# Altium PCB V-by-One.pcbdoc (part 1 of 2)
Units mil, origin at the board's own origin, x right, y up, seen from the top; angles counter-clockwise.
Board outline 3962.76 x 3236.76 mil, 2 copper layers (Top Layer, Bottom Layer); 214 components, 135 nets, 733 pads, 287 vias.
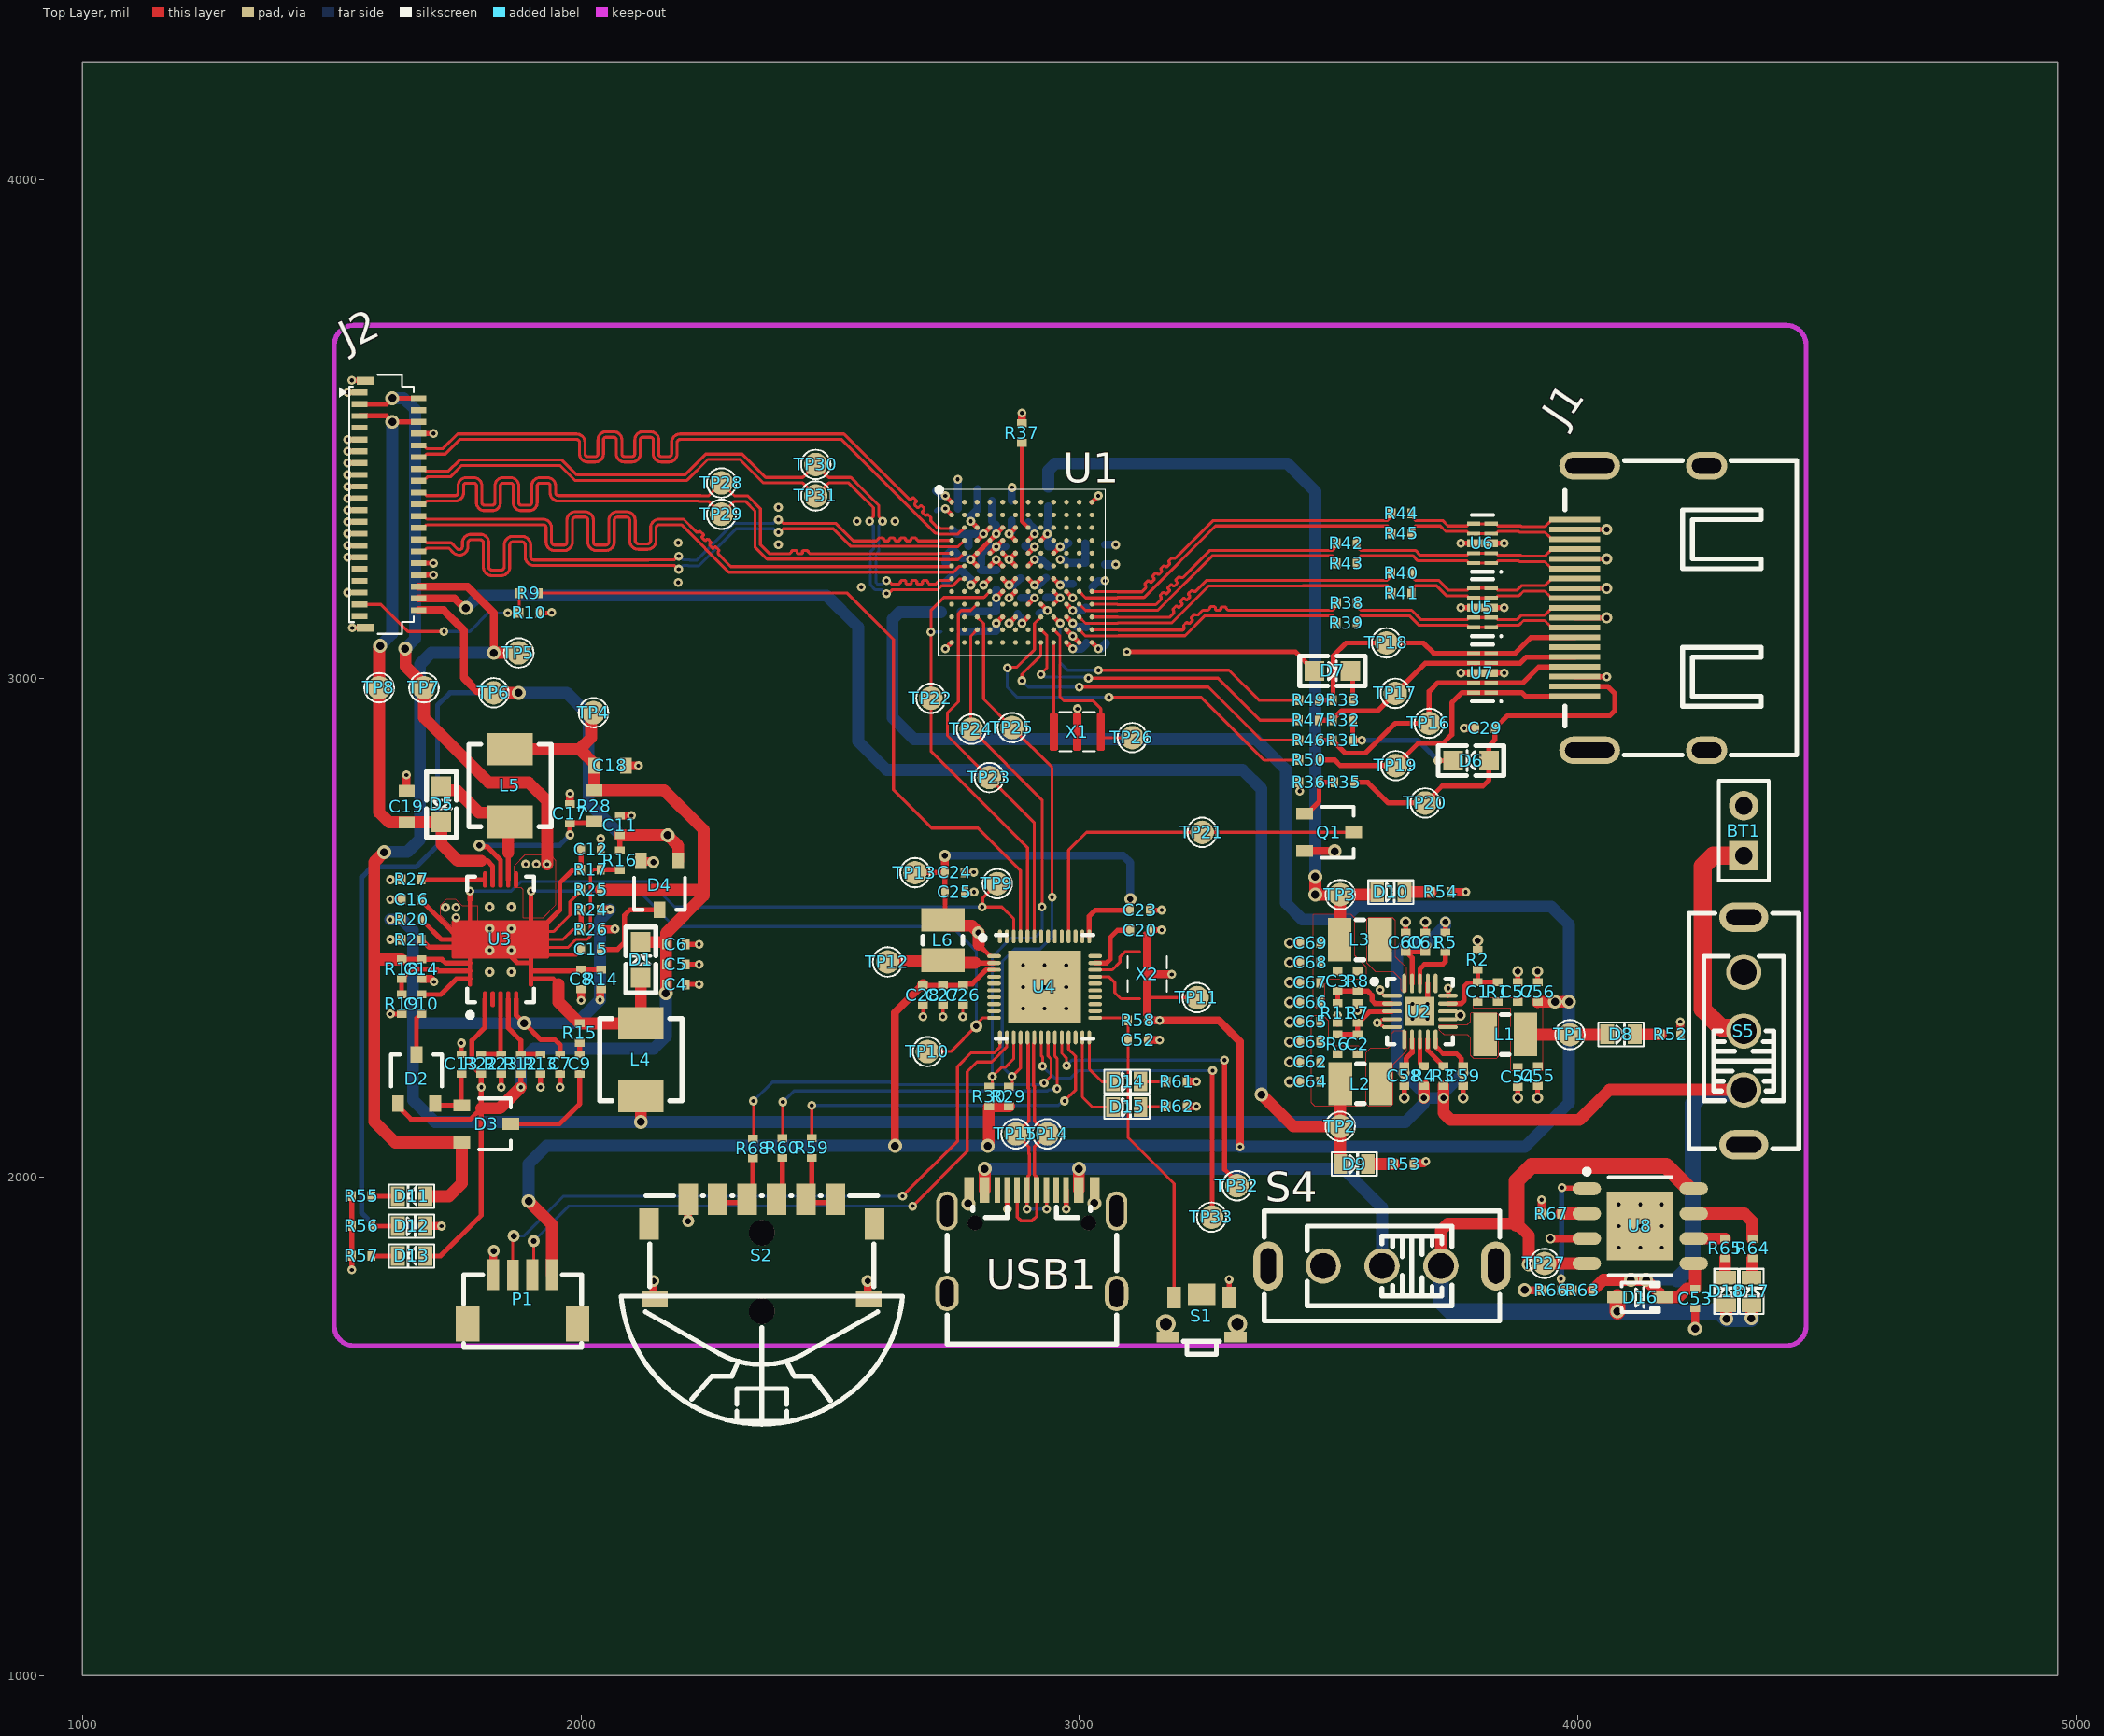
[diagram p0: Top Layer view]
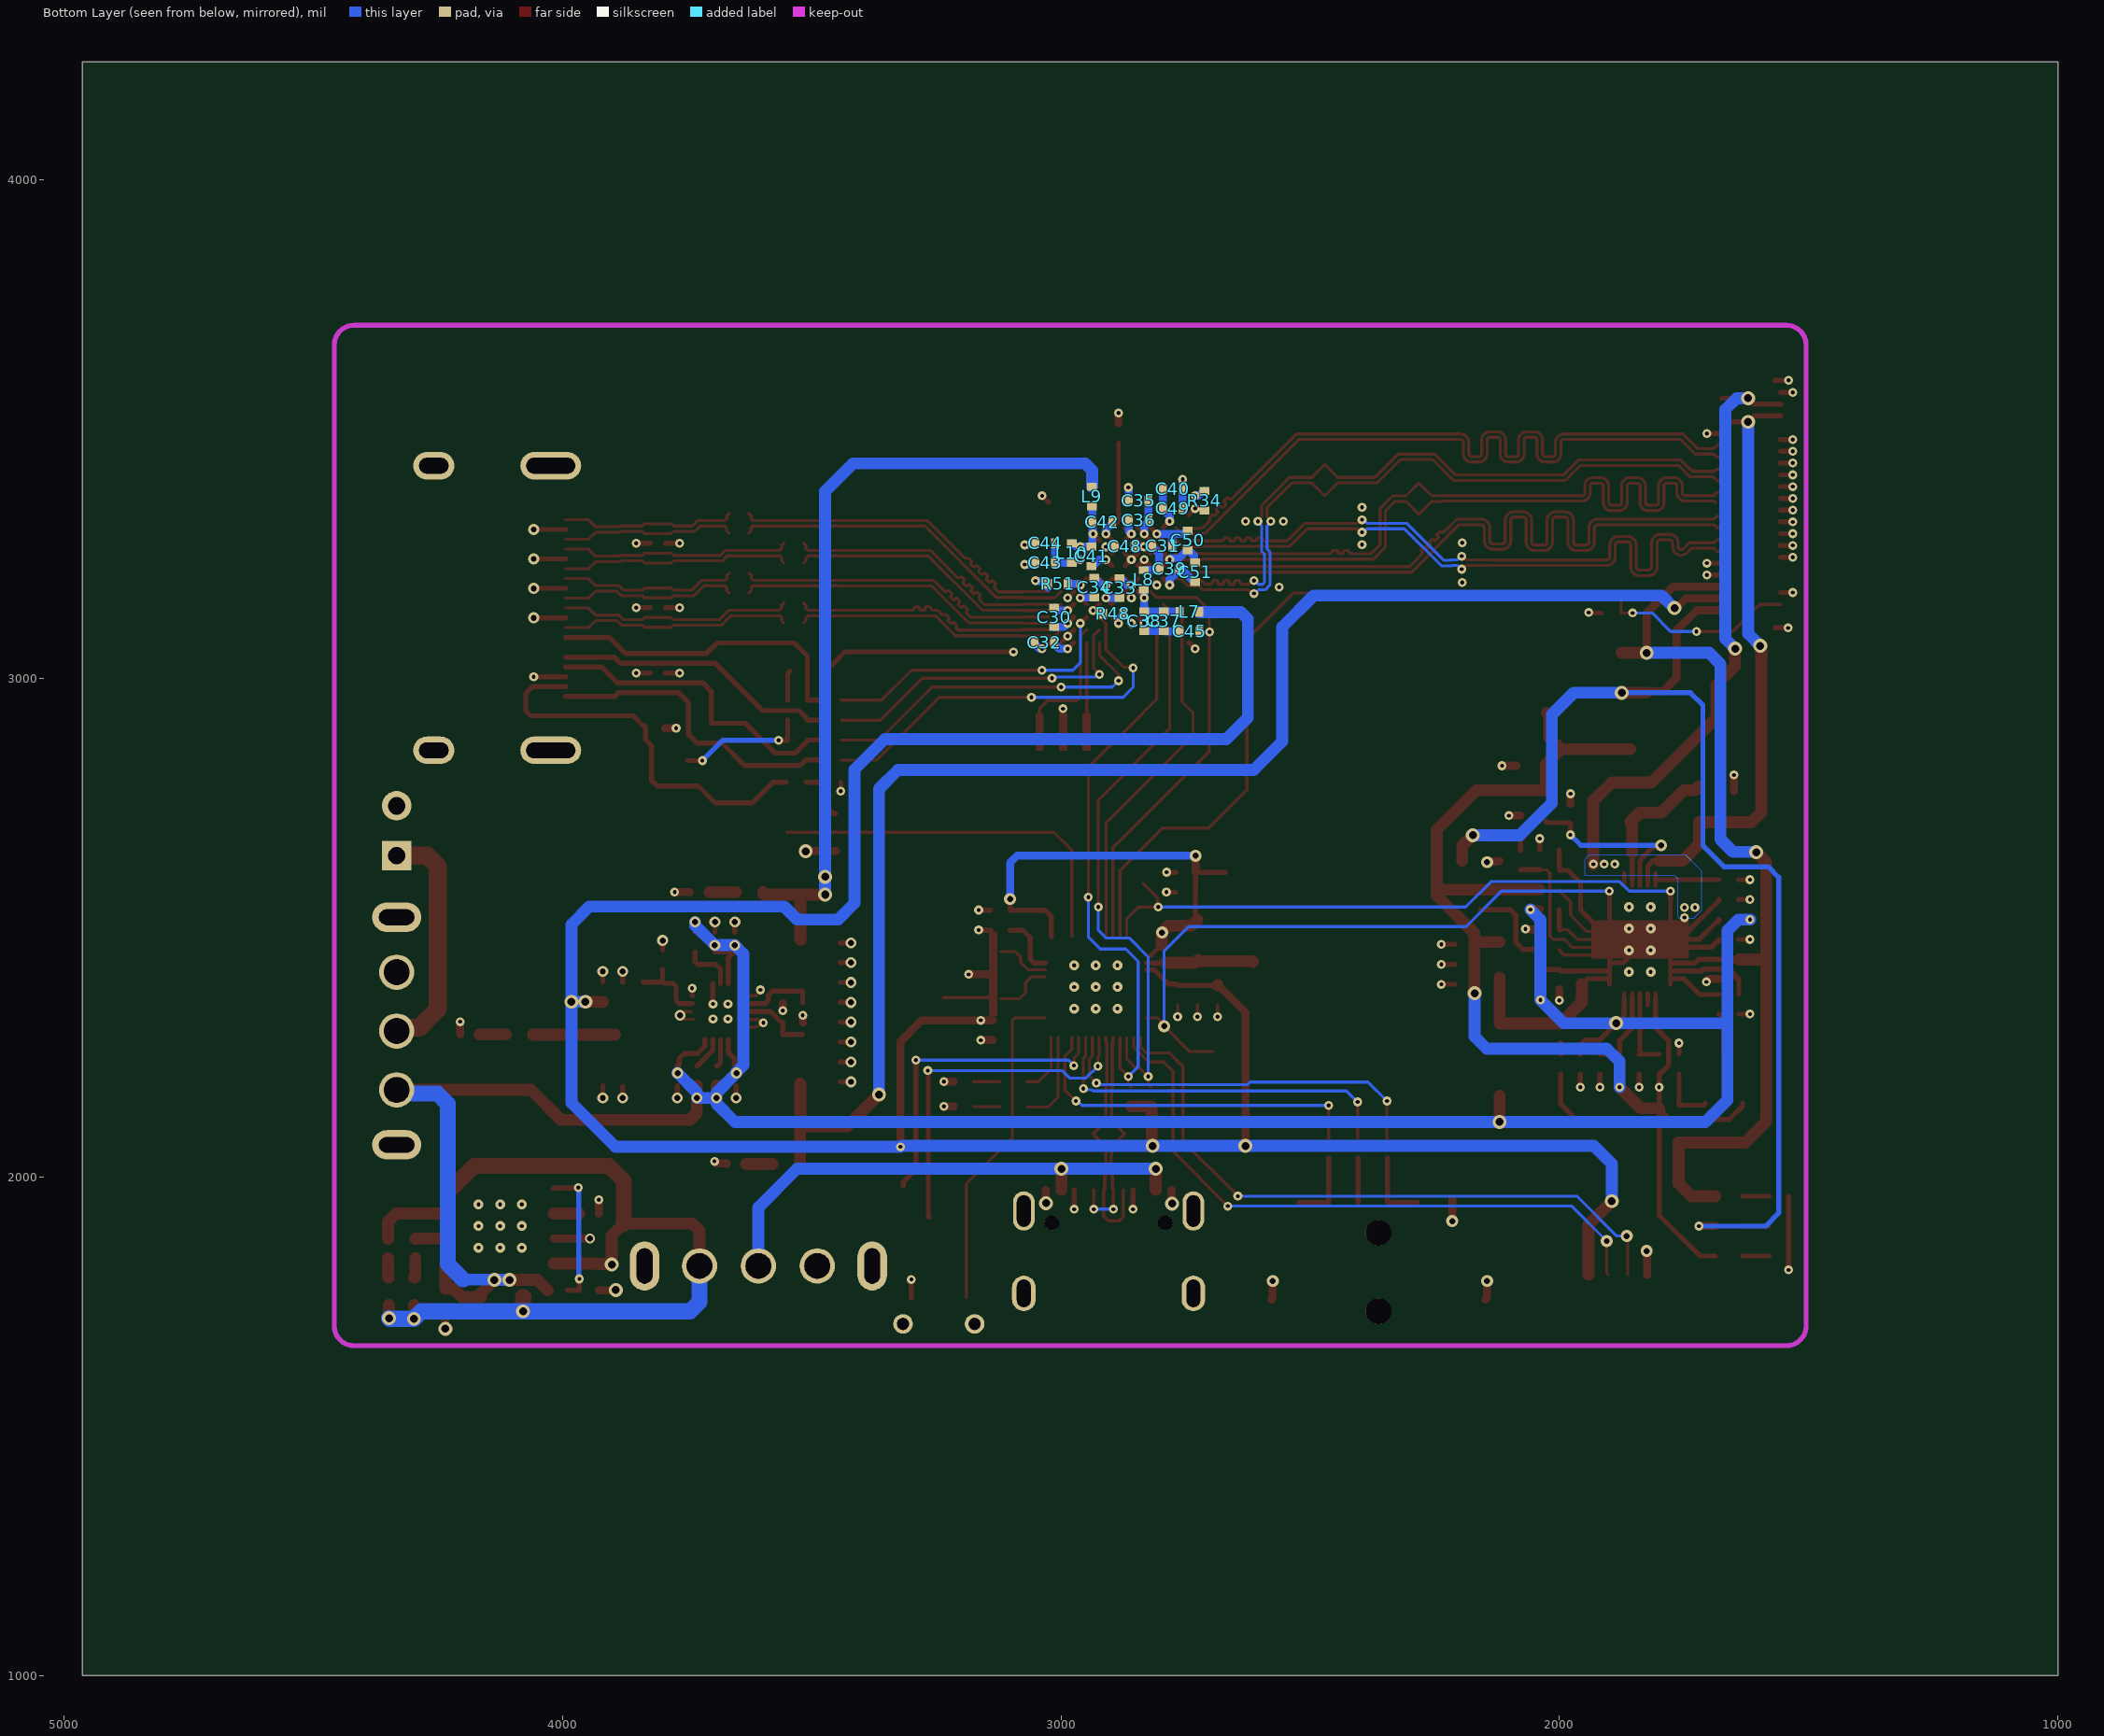
[diagram p1: Bottom Layer view, seen from below]

## Layer stack, top to bottom
Top Layer: signal copper (thickness not stored)
Dielectric: dielectric 12.6, FR-4, Dk 4.8
Bottom Layer: signal copper (thickness not stored)

## Board outline
4962.76,1000 1000,1000 1000,4236.76 4962.76,4236.76

## Components (designator, comment, footprint, x,y, rotation, side; value= is the part's Value field where it differs from the comment)
BT1 "8000mAH" HDR1X2 4332.64,2644.61 r90 top
C1 "Cap3" C0402#1 3799.13,2370.79 r270 top
C2 "Cap3" C0402#1 3558.06,2265.79 r270 top
C3 "Cap3" C0402#1 3518.06,2392.36 r90 top
C4 "Cap2" C0402#1 2190.32,2386.38 r180 top
C5 "Cap2" C0402#1 2190.32,2426.38 r180 top
C6 "Cap2" C0402#1 2190.32,2466.38 r180 top
C7 "Cap2" C0402#1 1958.14,2226.38 r90 top
C8 "Cap2" C0402#1 2000,2396.38 r270 top
C9 "Cap2" C0402#1 1997.52,2226.38 r90 top
C10 "Cap2" C0402#1 1680,2346.38 r270 top
C11 "Cap2" C0402#1 2077.64,2705.2 r270 top
C12 "Cap2" C0402#1 2020,2656.38 r180 top
C13 "Cap2" C0402#1 1760,2226.38 r270 top
C14 "Cap2" C0402#1 1680,2416.69 r90 top
C15 "Cap2" C0402#1 2020,2456.38 r180 top
C16 "Cap2" C0402#1 1660,2556.38 r0 top
C17 "Cap2" C0402#1 1977.64,2728.47 r270 top
C18 "Cap2" C0603 2058.23,2824.94 r180 top
C19 "Cap2" C0603 1650,2742.87 r270 top
C20 "Cap2" C0402#1 3121.3,2494.72 r0 top
C23 "Cap2" C0402#1 3120.98,2534.72 r180 top
C24 "Cap2" C0402#1 2749.68,2611.06 r180 top
C25 "Cap2" C0402#1 2750,2571.06 r180 top
C26 "Cap2" C0402#1 2765.98,2364.72 r90 top
C27 "Cap2" C0402#1 2725.98,2364.72 r90 top
C28 "Cap2" C0402#1 2685.98,2364.72 r90 top
C29 "Cap2" C0402#1 3813.5,2900.2 r180 top
C30 "Cap2" C0402#2 3013.5,3122.74 r270 bottom
C31 "Cap2" C0402#2 2796.76,3265.74 r180 bottom
C32 "Cap2" C0402#2 3033.5,3071.49 r0 bottom
C33 "Cap2" C0402#2 2882.5,3181.2 r90 bottom
C34 "Cap2" C0402#2 2933.5,3181.93 r90 bottom
C35 "Cap2" C0402#2 2844.19,3356.12 r0 bottom
C36 "Cap2" C0402#2 2844.5,3316.74 r0 bottom
C37 "Cap2" C0402#2 2793.12,3114.49 r270 bottom
C38 "Cap2" C0402#2 2833.12,3114.49 r270 bottom
C39 "Cap2" C0402#2 2782.25,3219.74 r180 bottom
C40 "Cap2" C0402#2 2775.5,3380.12 r180 bottom
C41 "Cap2" C0402#2 2938.5,3245.05 r270 bottom
C42 "Cap2" C0402#2 2916.82,3313.74 r180 bottom
C43 "Cap2" C0402#2 3031.19,3232.05 r0 bottom
C44 "Cap2" C0402#2 3031.5,3271.43 r0 bottom
C45 "Cap2" C0402#2 2741.87,3094 r180 bottom
C48 "Cap2" C0402#2 2872,3264.38 r0 bottom
C49 "Cap2" C0402#2 2775.5,3340.74 r180 bottom
C50 "Cap2" C0402#2 2745.5,3276.74 r90 bottom
C51 "Cap2" C0402#2 2731,3213.3 r270 bottom
C52 "Cap2" C0402#1 3117.2,2274.29 r180 top
C53 "Cap2" C0402#1 4235,1756.06 r90 top
C54 "Cap2" C0402#1 3879.13,2200.79 r90 top
C55 "Cap2" C0402#1 3919.13,2202.45 r90 top
C56 "Cap2" C0402#1 3919.13,2370.79 r270 top
C57 "Cap2" C0402#1 3879.13,2370.79 r270 top
C58 "Cap2" C0402#1 3651.45,2202.76 r90 top
C59 "Cap2" C0402#1 3769.59,2202.45 r90 top
C60 "Cap2" C0402#1 3654.13,2470.79 r270 top
C61 "Cap2" C0402#1 3694.13,2470.79 r270 top
C62 "Cap2" C0402#1 3462.88,2230.79 r0 top
C63 "Cap2" C0402#1 3462.88,2270.79 r0 top
C64 "Cap2" C0402#1 3462.88,2190.79 r0 top
C65 "Cap2" C0402#1 3462.88,2310.79 r0 top
C66 "Cap2" C0402#1 3462.88,2350.17 r0 top
C67 "Cap2" C0402#1 3462.88,2390.17 r0 top
C68 "Cap2" C0402#1 3462.88,2430.17 r0 top
C69 "Cap2" C0402#1 3462.88,2469.55 r0 top
D1 "B5819W" DO-SOD523 2120,2436.38 r90 top
D2 "BAT54S-KL4" SOT23-3 1670,2196.38 r0 top
D3 "BAT54S-KL4" SOT23-3 1810,2106.38 r270 top
D4 "BAT54S-KL4" SOT23-3 2157.64,2585.2 r180 top
D5 "B5819W" DO-SOD523 1720,2746.38 r270 top
D6 "B5819W" DO-SOD523 3784.38,2835.2 r180 top
D7 "B5819W" DO-SOD523 3508.5,3015.2 r0 top
D8 "红色0603" "LED0603 R" 4086.15,2285.88 r0 top
D9 "橙色0603" "LED0603 Y" 3551,2025.88 r0 top
D10 "橙色0603" "LED0603 Y" 3624.68,2571.38 r0 top
D11 "蓝色0603" "LED0603 B" 1660,1961.38 r180 top
D12 "蓝色0603" "LED0603 B" 1660,1901.38 r0 top
D13 "橙色0603" "LED0603 Y" 1660,1841.38 r180 top
D14 "绿色0603" "LED0603 G" 3095,2191.38 r0 top
D15 "绿色0603" "LED0603 G" 3095,2140.19 r0 top
D16 "B5819W" DO-SOD323 4125,1758.65 r0 top
D17 "蓝色0603" "LED0603 B" 4348.44,1770.29 r90 top
D18 "蓝色0603" "LED0603 B" 4297.25,1770.29 r90 top
J1 "HDMI_TYPE_A_0" HDMI-SMD_A71-05H9-111N1 4125.87,3141.38 r90 top
J2 "LCD_FPC_39P" FPC-SMD_FH26W-39S-0.3SHW-60 1615.03,3349.47 r270 top
L1 "252012CDMCDDS-2R2MC" IND-SMD_L2.5-W2.0 3854.13,2285.79 r180 top
L2 "252012CDMCDDS-2R2MC" IND-SMD_L2.5-W2.0 3563.66,2186.91 r0 top
L3 "252012CDMCDDS-2R2MC" IND-SMD_L2.5-W2.0 3562.54,2475.79 r0 top
L4 "SWPA4020S100MT" IND-SMD_L4.2-W4.4_MWSA0402S-XX 2120,2235.2 r90 top
L5 "SWPA4020S100MT" IND-SMD_L4.2-W4.4_MWSA0402S-XX 1857.64,2785.2 r270 top
L6 "UHP252010NF-100M" IND-SMD_L2.5-W2.0 2725.98,2475.2 r270 top
L7 "Ind1" L0402 2741.87,3133.38 r180 bottom
L8 "Ind1" L0402 2833.5,3197.74 r270 bottom
L9 "Ind1" L0402 2937.5,3364.99 r90 bottom
L10 "Ind1" L0402 2977.88,3251.74 r90 bottom
P1 "A1002WV-S-4P" CONN-SMD_A1002WV-S-4P 1882.64,1754.61 r0 top
Q1 "NPN1" SOT23-3 3500.87,2691.38 r270 top
R1 "Res2" R0402#1 3839.13,2370.79 r90 top
R2 "Res2" R0402#1 3799.13,2435.79 r90 top
R3 "Res1" R0402#1 3730.21,2202.76 r90 top
R4 "Res1" R0402#1 3690.83,2202.76 r90 top
R5 "Res1" R0402#1 3734.13,2470.79 r270 top
R6 "Res2" R0402#1 3518.06,2266.1 r90 top
R7 "Res2" R0402#1 3558.06,2328.91 r90 top
R8 "Res2" R0402#1 3558.06,2392.36 r270 top
R9 "1/32W" R0402#1 1895.55,3171.38 r0 top
R10 "1/32W" R0402#1 1895.87,3131.38 r180 top
R11 "Res2" R0402#1 3518.06,2329.23 r270 top
R12 "Res1" R0402#1 1879.38,2226.38 r90 top
R13 "Res1" R0402#1 1918.76,2226.38 r270 top
R14 "Res1" R0402#1 2040,2396.38 r90 top
R15 "Res1" R0402#1 1997.52,2288.34 r90 top
R16 "Res1" R0402#1 2077.64,2635.2 r270 top
R17 "Res1" R0402#1 2020,2616.38 r180 top
R18 "Res2" R0402#1 1640,2416.69 r270 top
R19 "Res2" R0402#1 1640,2346.38 r270 top
R20 "Res1" R0402#1 1660,2516.38 r0 top
R21 "Res1" R0402#1 1660,2476.38 r180 top
R22 "Res2" R0402#1 1800,2226.38 r90 top
R23 "Res2" R0402#1 1840,2226.38 r270 top
R24 "Res1" R0402#1 2020,2536.38 r180 top
R25 "Res1" R0402#1 2020,2576.38 r0 top
R26 "Res1" R0402#1 2020,2496.38 r0 top
R27 "Res1" R0402#1 1660.32,2596.38 r0 top
R28 "Res1" R0603 2026.73,2744.22 r90 top
R29 "Res1" R0402#1 2858.51,2161.38 r90 top
R30 "Res1" R0402#1 2819.13,2161.38 r90 top
R31 "Res1" R0402#1 3528.5,2876.38 r180 top
R32 "Res1" R0402#1 3528.5,2916.38 r180 top
R33 "Res1" R0402#1 3528.5,2956.38 r180 top
R34 "Res1" R0402#2 2712.5,3356.2 r270 bottom
R35 "Res1" R0402#1 3531.18,2791.38 r180 top
R36 "Res1" R0402#1 3460.87,2791.38 r180 top
R37 "Res1" R0402#1 2884.25,3492.2 r270 top
R38 "Res1" R0402#1 3536.18,3151.38 r0 top
R39 "Res1" R0402#1 3535.87,3111.38 r0 top
R40 "Res1" R0402#1 3645.55,3211.38 r0 top
R41 "Res1" R0402#1 3645.87,3171.38 r0 top
R42 "Res1" R0402#1 3535.87,3271.38 r0 top
R43 "Res1" R0402#1 3535.87,3231.38 r0 top
R44 "Res1" R0402#1 3645.87,3331.38 r0 top
R45 "Res1" R0402#1 3646.18,3291.38 r0 top
R46 "Res1" R0402#1 3460.38,2876.38 r0 top
R47 "Res1" R0402#1 3460.06,2916.38 r0 top
R48 "Res1" R0402#2 2895.5,3129.94 r180 bottom
R49 "Res1" R0402#1 3460.38,2956.38 r0 top
R50 "Res1" R0402#1 3460.38,2836.38 r0 top
R51 "Res1" R0402#2 3006.5,3189.36 r180 bottom
R52 "Res1" R0402#1 4185.83,2285.88 r0 top
R53 "Res1" R0402#1 3651,2025.88 r0 top
R54 "Res1" R0402#1 3724.68,2571.38 r0 top
R55 "Res1" R0402#1 1560,1961.38 r180 top
R56 "Res1" R0402#1 1560.32,1901.38 r180 top
R57 "Res1" R0402#1 1560,1841.38 r180 top
R58 "Res1" R0402#1 3117.2,2314.29 r180 top
R59 "Res1" R0402#1 2463.15,2057.81 r270 top
R60 "Res1" R0402#1 2404.09,2057.81 r270 top
R61 "Res1" R0402#1 3195,2191.38 r0 top
R62 "Res1" R0402#1 3195,2141.38 r0 top
R63 "Res1" R0402#1 4009.91,1772.43 r180 top
R64 "Res1" R0402#1 4350,1856.38 r90 top
R65 "Res1" R0402#1 4295,1856.38 r90 top
R66 "Res1" R0402#1 3946.78,1772.43 r180 top
R67 "Res1" R0402#1 3946.78,1926.38 r180 top
R68 "Res1" R0402#1 2345.04,2057.5 r270 top
S1 "SW1" SW-SMD_TCEPQR 3245,1721.38 r180 top
S2 "TM-2103" SW-SMD_TM-2103 2362.64,1854.61 r180 top
S4 "SW2" SW-TH_SS-12F44-G5 3606.89,1821.38 r180 top
S5 "SW2" SW-TH_SS-12F44-G5 4332.64,2292.72 r90 top
TP1 "TestPoint" TESTPOINT_15X15 3984,2285.38 r90 top
TP2 "TestPoint" TESTPOINT_15X15 3523,2101.38 r180 top
TP3 "TestPoint" TESTPOINT_15X15 3523,2566.38 r180 top
TP4 "TestPoint" TESTPOINT_15X15 2025,2931.38 r90 top
TP5 "TestPoint" TESTPOINT_15X15 1875,3051.38 r90 top
TP6 "TestPoint" TESTPOINT_15X15 1825,2971.38 r90 top
TP7 "TestPoint" TESTPOINT_15X15 1685,2981.38 r90 top
TP8 "TestPoint" TESTPOINT_15X15 1595,2981.38 r90 top
TP9 "TestPoint" TESTPOINT_15X15 2835,2588.38 r90 top
TP10 "TestPoint" TESTPOINT_15X15 2695,2251.38 r90 top
TP11 "TestPoint" TESTPOINT_15X15 3235.98,2359.72 r270 top
TP12 "TestPoint" TESTPOINT_15X15 2615,2431.38 r270 top
TP13 "TestPoint" TESTPOINT_15X15 2670,2610.38 r270 top
TP14 "TestPoint" TESTPOINT_15X15 2935.47,2086.38 r270 top
TP15 "TestPoint" TESTPOINT_15X15 2872.47,2086.38 r270 top
TP16 "TestPoint" TESTPOINT_15X15 3701.48,2910.2 r90 top
TP17 "TestPoint" TESTPOINT_15X15 3633.5,2970.2 r90 top
TP18 "TestPoint" TESTPOINT_15X15 3615.87,3071.38 r90 top
TP19 "TestPoint" TESTPOINT_15X15 3634.5,2825.2 r90 top
TP20 "TestPoint" TESTPOINT_15X15 3693.5,2750.2 r90 top
TP21 "TestPoint" TESTPOINT_15X15 3246,2691.38 r90 top
TP22 "TestPoint" TESTPOINT_15X15 2702,2960.38 r90 top
TP23 "TestPoint" TESTPOINT_15X15 2819,2801.38 r90 top
TP24 "TestPoint" TESTPOINT_15X15 2783,2898.38 r90 top
TP25 "TestPoint" TESTPOINT_15X15 2865,2901.38 r90 top
TP26 "TestPoint" TESTPOINT_15X15 3105.87,2881.38 r90 top
TP27 "TestPoint" TESTPOINT_15X15 3933,1826.38 r90 top
TP28 "TestPoint" TESTPOINT_15X15 2281.87,3392.38 r90 top
TP29 "TestPoint" TESTPOINT_15X15 2281.87,3329.38 r90 top
TP30 "TestPoint" TESTPOINT_15X15 2470.87,3429.38 r90 top
TP31 "TestPoint" TESTPOINT_15X15 2470.87,3366.38 r90 top
TP32 "TestPoint" TESTPOINT_15X15 3316,1982.38 r90 top
TP33 "TestPoint" TESTPOINT_15X15 3265,1919.38 r90 top
U1 "RK628D" RK628D_WBBGA144 2884.25,3212.99 r0 top
U2 "TMI7003" TMI7003_QFN20_3X3 3682.98,2332.01 r0 top
U3 "TPS65142" TPS65142_R-PWQFN-N32_LOWDENSITY 1838.5,2476.46 r90 top
U4 "CH582M" CH582M_QFN48_5X5 2930,2381.06 r0 top
U5 "ESD5344D" ESD_5344D_DFN-2510-10L 3808.35,3142.01 r180 top
U6 "ESD5344D" ESD_5344D_DFN-2510-10L 3808.35,3271.06 r180 top
U7 "ESD5344D" ESD_5344D_DFN-2510-10L 3808.35,3011.06 r180 top
U8 "TP4056" TP4056_ESOP8 4125,1901.38 r0 top
USB1 "USB3.1C16PFSMT" USB-C-SMD_TYPE-C-USB-17 2904.39,1870.08 r0 top
X1 "24MHz" XTAL-3213#1 2995.47,2893.11 r180 top
X2 "8MHz" XTAL-3213#2 3135.98,2406.97 r270 top

## Footprints (in the part's own frame and the unit in brackets; to place one, negate y for a bottom-side part, rotate by r counter-clockwise, add the part's x,y. Pads: shape width x height; smd on the part's side, far side on the other; paste and mask are expansions set on the pad)
C0402#1 [mm]
  rect 0.4x0.5 smd paste+0 mask+0.051: 1(-0.5,0) 2(0.5,0)
C0402#2 [mm]
  rect 0.4x0.5 smd paste+0 mask+0.051: 1(0.5,0) 2(-0.5,0)
C0603 [mm]
  rect 0.6x0.8 smd paste+0 mask+0.051: 1(-0.8,0) 2(0.8,0)
CH582M_QFN48_5X5 [mm]
  oval 0.7x0.2 smd paste+0 mask+0.051: 1(-2.575,1.575) 2(-2.575,1.225) 3(-2.575,0.875) 4(-2.575,0.525) 5(-2.575,0.175) 6(-2.575,-0.175) 7(-2.575,-0.525) 8(-2.575,-0.875) 9(-2.575,-1.225) 10(-2.575,-1.575) 25(2.575,-1.575) 26(2.575,-1.225) 27(2.575,-0.875) 28(2.575,-0.525) 29(2.575,-0.175) 30(2.575,0.175) 31(2.575,0.525) 32(2.575,0.875) 33(2.575,1.225) 34(2.575,1.575)
  oval 0.2x0.7 smd paste+0 mask+0.051: 11(-2.275,-2.575) 12(-1.925,-2.575) 13(-1.575,-2.575) 14(-1.225,-2.575) 15(-0.875,-2.575) 16(-0.525,-2.575) 17(-0.175,-2.575) 18(0.175,-2.575) 19(0.525,-2.575) 20(0.875,-2.575) 21(1.225,-2.575) 22(1.575,-2.575) 23(1.925,-2.575) 24(2.275,-2.575) 35(2.275,2.575) 36(1.925,2.575) 37(1.575,2.575) 38(1.225,2.575) 39(0.875,2.575) 40(0.525,2.575) 41(0.175,2.575) 42(-0.175,2.575) 43(-0.525,2.575) 44(-0.875,2.575) 45(-1.225,2.575) 46(-1.575,2.575) 47(-1.925,2.575) 48(-2.275,2.575)
  rect 3.7x3.7 smd paste+0 mask+0.051: 49(0,0)
  silkscreen extent -3.27,-2.65 2.5,2.65
CONN-SMD_A1002WV-S-4P [mm]
  rect 0.6x1.55 smd paste+0 mask+0.051: 1(1.5,1.251) 2(0.5,1.251) 3(-0.498,1.249) 4(-1.5,1.251)
  rect 1.2x1.8 smd paste+0 mask+0.051: 5(2.8,-1.251) 6(-2.8,-1.251)
  silkscreen extent -3,-2.45 3,1.25
DO-SOD323 [mm]
  rect 1x0.6 smd paste+0 mask+0.051: 1(-1.175,0) 2(1.175,0)
  silkscreen extent -0.95,-0.75 0.95,0.75
DO-SOD523 [mm]
  rect 1x1 smd paste+0 mask+0.051: 1(-0.94,0) 2(0.889,0)
  silkscreen extent -1.7,-0.76 1.65,0.76
ESD_5344D_DFN-2510-10L [mm]
  rect 0.675x0.2 smd paste+0 mask+0.051: 1(-0.445,1) 2(-0.445,0.5) 4(-0.445,-0.5) 5(-0.445,-1) 6(0.445,-1) 7(0.445,-0.5) 9(0.445,0.5) 10(0.445,1)
  rect 0.8x0.4 smd paste+0 mask+0.051: 3(-0.382,0) 8(0.383,0)
  silkscreen extent -1,-1.45 0.55,1.5
FPC-SMD_FH26W-39S-0.3SHW-60 [mm]
  rect 0.3x0.8 smd paste+0 mask+0.051: 1(-5.7,-1.501) 2(-5.403,1.503) 3(-5.102,-1.504) 4(-4.799,1.501) 5(-4.502,-1.502) 6(-4.199,1.501) 7(-3.902,-1.502) 8(-3.599,1.501) 9(-3.302,-1.502) 10(-2.999,1.503) 11(-2.702,-1.502) 12(-2.399,1.502) 13(-2.102,-1.502) 14(-1.8,1.503) 15(-1.502,-1.503) 16(-1.199,1.501) 17(-0.902,-1.502) 18(-0.599,1.5) 19(-0.302,-1.503) 20(0.001,1.501) 21(0.298,-1.502) 22(0.601,1.501) 23(0.898,-1.502) 24(1.201,1.5) 25(1.498,-1.502) 26(1.801,1.5) 27(2.098,-1.502) 28(2.401,1.5) 29(2.698,-1.502) 30(3.001,1.5) 31(3.298,-1.502) 32(3.601,1.503) 33(3.898,-1.502) 34(4.201,1.5) 35(4.498,-1.502) 36(4.801,1.501) 37(5.098,-1.502) 38(5.401,1.501) 39(5.698,-1.502)
  rect 0.4x0.9 smd paste+0 mask+0.051: 40(-6.3,-1.196) 41(6.3,-1.196)
  silkscreen extent -6.6,-2.54 6.6,1.25
HDMI-SMD_A71-05H9-111N1 [mm]
  rect 0.28x2.6 smd paste+0 mask+0.051: 1(4.5,3.36) 2(4,3.36) 3(3.5,3.36) 4(3,3.36) 5(2.5,3.36) 6(2,3.36) 7(1.5,3.36) 8(1,3.36) 9(0.5,3.36) 10(0,3.36) 11(-0.5,3.36) 12(-1,3.36) 13(-1.5,3.36) 14(-2,3.36) 15(-2.5,3.36) 16(-3,3.36) 17(-3.5,3.36) 18(-4,3.36) 19(-4.5,3.36)
  oval 1.4x3.1 hole 0.8 slot 2.5 at 90 deg paste+0 mask+0.051: 20(-7.25,2.6) 22(7.25,2.6)
  oval 1.4x2.1 hole 0.8 slot 1.5 at 90 deg paste+0 mask+0.051: 21(-7.25,-3.36) 23(7.25,-3.36)
  silkscreen extent -7.49,-7.95 7.51,3.86
HDR1X2 [mm]
  rect 1.5x1.5 hole 0.9 paste+0 mask+0.051: 1(0,0)
  round 1.5 hole 0.9 paste+0 mask+0.051: 2(2.54,0)
  silkscreen extent -1.27,-1.27 3.81,1.27
IND-SMD_L2.5-W2.0 [mm]
  rect 1.2x2.2 smd paste+0 mask+0.051: 1(1.028,0) 2(-1.028,0)
  silkscreen extent -0.2,-1.02 0.2,1.02
IND-SMD_L4.2-W4.4_MWSA0402S-XX [mm]
  rect 1.65x2.3 smd paste+0 mask+0.051: 1(-1.85,0) 2(1.85,0)
  silkscreen extent -2.1,-2.1 2.1,2.1
L0402 [mm]
  rect 0.4x0.5 smd paste+0 mask+0.051: 1(0.5,0) 2(-0.5,0)
"LED0603 B" [mm]
  rect 0.7x1 smd paste+0 mask+0.051: 1(-0.7,0) 2(0.7,0)
  silkscreen extent -1.15,-0.6 1.15,0.6
"LED0603 G" [mm]
  rect 0.7x1 smd paste+0 mask+0.051: 1(-0.7,0) 2(0.7,0)
  silkscreen extent -1.15,-0.6 1.15,0.6
"LED0603 R" [mm]
  rect 0.7x1 smd paste+0 mask+0.051: 1(-0.7,0) 2(0.7,0)
  silkscreen extent -1.15,-0.6 1.15,0.6
"LED0603 Y" [mm]
  rect 0.7x1 smd paste+0 mask+0.051: 1(-0.7,0) 2(0.7,0)
  silkscreen extent -1.15,-0.6 1.15,0.6
R0402#1 [mm]
  rect 0.4x0.5 smd paste+0 mask+0.051: 1(-0.5,0) 2(0.5,0)
R0402#2 [mm]
  rect 0.4x0.5 smd paste+0 mask+0.051: 1(0.5,0) 2(-0.5,0)
R0603 [mm]
  rect 0.6x0.8 smd paste+0 mask+0.051: 1(-0.8,0) 2(0.8,0)
RK628D_WBBGA144 [mm]
  round 0.25 smd paste+0 mask+0.051: A1(-3.575,3.575) A2(-2.925,3.575) A3(-2.275,3.575) A4(-1.625,3.575) A5(-0.975,3.575) A6(-0.325,3.575) A7(0.325,3.575) A8(0.975,3.575) A9(1.625,3.575) A10(2.275,3.575) A11(2.925,3.575) A12(3.575,3.575) B1(-3.575,2.925) B2(-2.925,2.925) B3(-2.275,2.925) B4(-1.625,2.925) B5(-0.975,2.925) B6(-0.325,2.925) B7(0.325,2.925) B8(0.975,2.925) B9(1.625,2.925) B10(2.275,2.925) B11(2.925,2.925) B12(3.575,2.925) C1(-3.575,2.275) C2(-2.925,2.275) C3(-2.275,2.275) C4(-1.625,2.275) C5(-0.975,2.275) C6(-0.325,2.275) C7(0.325,2.275) C8(0.975,2.275) C9(1.625,2.275) C10(2.275,2.275) C11(2.925,2.275) C12(3.575,2.275) D1(-3.575,1.625) D2(-2.925,1.625) D3(-2.275,1.625) D4(-1.625,1.625) D5(-0.975,1.625) D6(-0.325,1.625) D7(0.325,1.625) D8(0.975,1.625) D9(1.625,1.625) D10(2.275,1.625) D11(2.925,1.625) D12(3.575,1.625) E1(-3.575,0.975) E2(-2.925,0.975) E3(-2.275,0.975) E4(-1.625,0.975) E5(-0.975,0.975) E6(-0.325,0.975) E7(0.325,0.975) E8(0.975,0.975) E9(1.625,0.975) E10(2.275,0.975) E11(2.925,0.975) E12(3.575,0.975) F1(-3.575,0.325) F2(-2.925,0.325) F3(-2.275,0.325) F4(-1.625,0.325) F5(-0.975,0.325) F6(-0.325,0.325) F7(0.325,0.325) F8(0.975,0.325) F9(1.625,0.325) F10(2.275,0.325) F11(2.925,0.325) F12(3.575,0.325) G1(-3.575,-0.325) G2(-2.925,-0.325) G3(-2.275,-0.325) G4(-1.625,-0.325) G5(-0.975,-0.325) G6(-0.325,-0.325) G7(0.325,-0.325) G8(0.975,-0.325) G9(1.625,-0.325) G10(2.275,-0.325) G11(2.925,-0.325) G12(3.575,-0.325) H1(-3.575,-0.975) H2(-2.925,-0.975) H3(-2.275,-0.975) H4(-1.625,-0.975) H5(-0.975,-0.975) H6(-0.325,-0.975) H7(0.325,-0.975) H8(0.975,-0.975) H9(1.625,-0.975) H10(2.275,-0.975) H11(2.925,-0.975) H12(3.575,-0.975) J1(-3.575,-1.625) J2(-2.925,-1.625) J3(-2.275,-1.625) J4(-1.625,-1.625) J5(-0.975,-1.625) J6(-0.325,-1.625) J7(0.325,-1.625) J8(0.975,-1.625) J9(1.625,-1.625) J10(2.275,-1.625) J11(2.925,-1.625) J12(3.575,-1.625) K1(-3.575,-2.275) K2(-2.925,-2.275) K3(-2.275,-2.275) K4(-1.625,-2.275) K5(-0.975,-2.275) K6(-0.325,-2.275) K7(0.325,-2.275) K8(0.975,-2.275) K9(1.625,-2.275) K10(2.275,-2.275) K11(2.925,-2.275) K12(3.575,-2.275) L1(-3.575,-2.925) L2(-2.925,-2.925) L3(-2.275,-2.925) L4(-1.625,-2.925) L5(-0.975,-2.925) L6(-0.325,-2.925) L7(0.325,-2.925) L8(0.975,-2.925) L9(1.625,-2.925) L10(2.275,-2.925) L11(2.925,-2.925) L12(3.575,-2.925) M1(-3.575,-3.575) M2(-2.925,-3.575) M3(-2.275,-3.575) M4(-1.625,-3.575) M5(-0.975,-3.575) M6(-0.325,-3.575) M7(0.325,-3.575) M8(0.975,-3.575) M9(1.625,-3.575) M10(2.275,-3.575) M11(2.925,-3.575) M12(3.575,-3.575)
  silkscreen extent -4.33,-4.25 4.25,4.33
SOT23-3 [mm]
  rect 0.6x0.85 smd paste+0 mask+0.051: 1(-0.95,-1.25) 2(0.95,-1.25) 3(0,1.25)
  silkscreen extent -1.3,-0.38 1.3,1.25
SW-SMD_TCEPQR [mm]
  rect 0.7x1.1 smd paste+0 mask+0.051: 1(-1.4,-0.937) 2(1.4,-0.937)
  rect 1.15x0.55 smd paste+0 mask+0.051: 3(1.725,1.087) 4(-1.725,1.087)
  round 1 hole 0.6 slot 0.605 at 90 deg paste+0 mask+0.051: 3(1.825,0.413) 4(-1.825,0.413)
  rect 1.4x1.1 smd paste+0 mask+0.051: 5(0,-1.088)
  silkscreen extent -0.92,1.3 0.92,1.96
SW-SMD_TM-2103 [mm]
  rect 1.3x0.8 smd paste+0 mask+0.051: a(-5.45,2.55) a(5.45,2.55)
  rect 1x1.6 smd paste+0 mask+0.051: b(3.75,-2.55) c(2.25,-2.55) d(0.75,-2.55) e(-0.75,-2.55) f(-2.25,-2.55) g(-3.75,-2.55) s(-5.75,-1.3) s(5.75,-1.3)
  round 1.3 hole 1.3 slot 1.305 at 0 deg unplated paste+0 mask+0.051: ""(0,3.15) ""(0,-0.85)
  silkscreen extent -7.18,-2.73 7.17,8.91
SW-TH_SS-12F44-G5 [mm]
  round 1.8 hole 1.3 slot 1.305 at 0 deg paste+0 mask+0.051: 1(-3,0) 2(0,0) 3(3,0)
  oval 1.5x2.5 hole 0.8 slot 1.8 at 90 deg paste+0 mask+0.051: 4(5.8,0) 5(-5.8,0)
  silkscreen extent -6,-2.8 6,2.8
TESTPOINT_15X15 [mm]
  round 1.2 smd paste+0 mask+0.051: 1(0,0)
  silkscreen extent -0.75,-0.75 0.75,0.75
TMI7003_QFN20_3X3 [mm]
  oval 1x0.2 smd paste+0 mask+0.051: 1(-1.425,0.8) 2(-1.425,0.4) 3(-1.425,0) 4(-1.425,-0.4) 5(-1.425,-0.8) 11(1.425,-0.8) 12(1.425,-0.4) 13(1.425,0) 14(1.425,0.4) 15(1.425,0.8)
  oval 0.2x1 smd paste+0 mask+0.051: 6(-0.8,-1.425) 7(-0.4,-1.425) 8(0,-1.425) 9(0.4,-1.425) 10(0.8,-1.425) 16(0.8,1.425) 17(0.4,1.425) 18(0,1.425) 19(-0.4,1.425) 20(-0.8,1.425)
  rect 1.48x1.48 smd paste+0 mask+0.051: 21(0,0)
  silkscreen extent -2.45,-1.68 1.68,1.67
TP4056_ESOP8 [mm]
  oval 1.45x0.65 smd paste+0 mask+0.051: 1(-2.725,1.905) 2(-2.725,0.635) 3(-2.725,-0.635) 4(-2.725,-1.905) 5(2.725,-1.905) 6(2.725,-0.635) 7(2.725,0.635) 8(2.725,1.905)
  rect 3.4x3.5 smd paste+0 mask+0.051: 9(0,0)
  silkscreen extent -2.85,-2.5 1.6,2.9
TPS65142_R-PWQFN-N32_LOWDENSITY [mil]
  Top Layer region: 135.83,-29.53 135.83,-33.47 135.83,-33.47 133.86,-35.43 133.86,-35.43 106.3,-35.43 106.3,-35.43 104.33,-33.47 104.33,-33.47 104.33,-29.53 104.33,-29.53 106.3,-27.56 106.3,-27.56 133.86,-27.56 133.86,-27.56
  Top Layer region: 135.83,-13.78 135.83,-17.72 135.83,-17.72 133.86,-19.69 133.86,-19.69 106.3,-19.69 106.3,-19.69 104.33,-17.72 104.33,-17.72 104.33,-13.78 104.33,-13.78 106.3,-11.81 106.3,-11.81 133.86,-11.81 133.86,-11.81
  Top Layer region: 135.83,1.97 135.83,-1.97 135.83,-1.97 133.86,-3.94 133.86,-3.94 106.3,-3.94 106.3,-3.94 104.33,-1.97 104.33,-1.97 104.33,1.97 104.33,1.97 106.3,3.94 106.3,3.94 133.86,3.94 133.86,3.94
  Top Layer region: 135.83,17.72 135.83,13.78 135.83,13.78 133.86,11.81 133.86,11.81 106.3,11.81 106.3,11.81 104.33,13.78 104.33,13.78 104.33,17.72 104.33,17.72 106.3,19.68 106.3,19.68 133.86,19.68 133.86,19.68
  Top Layer region: 135.83,33.46 135.83,29.53 135.83,29.53 133.86,27.56 133.86,27.56 106.3,27.56 106.3,27.56 104.33,29.53 104.33,29.53 104.33,33.46 104.33,33.46 106.3,35.43 106.3,35.43 133.86,35.43 133.86,35.43
  Top Layer region: 62.99,59.05 62.99,62.99 62.99,62.99 64.96,64.96 64.96,64.96 92.52,64.96 92.52,64.96 94.49,62.99 94.49,62.99 94.49,59.05 94.49,59.05 92.52,57.09 92.52,57.09 64.96,57.09 64.96,57.09
  Top Layer region: -94.49,-62.99 -94.49,-59.06 -94.49,-59.06 -92.52,-57.09 -92.52,-57.09 -64.96,-57.09 -64.96,-57.09 -62.99,-59.06 -62.99,-59.06 -62.99,-62.99 -62.99,-62.99 -64.96,-64.96 -64.96,-64.96 -92.52,-64.96 -92.52,-64.96
  Top Layer region: -78.74,-62.99 -78.74,-59.06 -78.74,-59.06 -76.77,-57.09 -76.77,-57.09 -49.21,-57.09 -49.21,-57.09 -47.24,-59.06 -47.24,-59.06 -47.24,-62.99 -47.24,-62.99 -49.21,-64.96 -49.21,-64.96 -76.77,-64.96 -76.77,-64.96
  Top Layer region: -62.99,-62.99 -62.99,-59.06 -62.99,-59.06 -61.02,-57.09 -61.02,-57.09 -33.46,-57.09 -33.46,-57.09 -31.5,-59.06 -31.5,-59.06 -31.5,-62.99 -31.5,-62.99 -33.46,-64.96 -33.46,-64.96 -61.02,-64.96 -61.02,-64.96
  Top Layer region: -47.24,-62.99 -47.24,-59.06 -47.24,-59.06 -45.28,-57.09 -45.28,-57.09 -17.72,-57.09 -17.72,-57.09 -15.75,-59.06 -15.75,-59.06 -15.75,-62.99 -15.75,-62.99 -17.72,-64.96 -17.72,-64.96 -45.28,-64.96 -45.28,-64.96
  Top Layer region: -31.5,-62.99 -31.5,-59.06 -31.5,-59.06 -29.53,-57.09 -29.53,-57.09 -1.97,-57.09 -1.97,-57.09 0,-59.06 0,-59.06 0,-62.99 0,-62.99 -1.97,-64.96 -1.97,-64.96 -29.53,-64.96 -29.53,-64.96 -31.5,-62.99
  Top Layer region: -15.75,-62.99 -15.75,-59.06 -15.75,-59.06 -13.78,-57.09 -13.78,-57.09 13.78,-57.09 13.78,-57.09 15.75,-59.06 15.75,-59.06 15.75,-62.99 15.75,-62.99 13.78,-64.96 13.78,-64.96 -13.78,-64.96 -13.78,-64.96
  Top Layer region: 0,-62.99 0,-59.06 0,-59.06 1.97,-57.09 1.97,-57.09 29.53,-57.09 29.53,-57.09 31.5,-59.06 31.5,-59.06 31.5,-62.99 31.5,-62.99 29.53,-64.96 29.53,-64.96 1.97,-64.96 1.97,-64.96
  Top Layer region: 15.75,-62.99 15.75,-59.06 15.75,-59.06 17.72,-57.09 17.72,-57.09 45.28,-57.09 45.28,-57.09 47.24,-59.06 47.24,-59.06 47.24,-62.99 47.24,-62.99 45.28,-64.96 45.28,-64.96 17.72,-64.96 17.72,-64.96
  Top Layer region: 31.5,-62.99 31.5,-59.06 31.5,-59.06 33.46,-57.09 33.46,-57.09 61.02,-57.09 61.02,-57.09 62.99,-59.06 62.99,-59.06 62.99,-62.99 62.99,-62.99 61.02,-64.96 61.02,-64.96 33.46,-64.96 33.46,-64.96
  Top Layer region: 47.24,-62.99 47.24,-59.06 47.24,-59.06 49.21,-57.09 49.21,-57.09 76.77,-57.09 76.77,-57.09 78.74,-59.06 78.74,-59.06 78.74,-62.99 78.74,-62.99 76.77,-64.96 76.77,-64.96 49.21,-64.96 49.21,-64.96
  Top Layer region: 62.99,-62.99 62.99,-59.06 62.99,-59.06 64.96,-57.09 64.96,-57.09 92.52,-57.09 92.52,-57.09 94.49,-59.06 94.49,-59.06 94.49,-62.99 94.49,-62.99 92.52,-64.96 92.52,-64.96 64.96,-64.96 64.96,-64.96
  Top Layer region: -104.33,33.46 -104.33,29.53 -104.33,29.53 -106.3,27.56 -106.3,27.56 -133.86,27.56 -133.86,27.56 -135.83,29.53 -135.83,29.53 -135.83,33.46 -135.83,33.46 -133.86,35.43 -133.86,35.43 -106.3,35.43 -106.3,35.43
  Top Layer region: -104.33,17.72 -104.33,13.78 -104.33,13.78 -106.3,11.81 -106.3,11.81 -133.86,11.81 -133.86,11.81 -135.83,13.78 -135.83,13.78 -135.83,17.72 -135.83,17.72 -133.86,19.68 -133.86,19.68 -106.3,19.68 -106.3,19.68
  Top Layer region: -104.33,1.97 -104.33,-1.97 -104.33,-1.97 -106.3,-3.94 -106.3,-3.94 -133.86,-3.94 -133.86,-3.94 -135.83,-1.97 -135.83,-1.97 -135.83,1.97 -135.83,1.97 -133.86,3.94 -133.86,3.94 -106.3,3.94 -106.3,3.94
  Top Layer region: -104.33,-13.78 -104.33,-17.72 -104.33,-17.72 -106.3,-19.69 -106.3,-19.69 -133.86,-19.69 -133.86,-19.69 -135.83,-17.72 -135.83,-17.72 -135.83,-13.78 -135.83,-13.78 -133.86,-11.81 -133.86,-11.81 -106.3,-11.81 -106.3,-11.81
  Top Layer region: -104.33,-29.53 -104.33,-33.47 -104.33,-33.47 -106.3,-35.43 -106.3,-35.43 -133.86,-35.43 -133.86,-35.43 -135.83,-33.47 -135.83,-33.47 -135.83,-29.53 -135.83,-29.53 -133.86,-27.56 -133.86,-27.56 -106.3,-27.56 -106.3,-27.56
  Top Layer region: -38.39,-95.52 -38.39,95.52 -38.39,95.52 -38.39,95.52 -38.39,95.52 -36.47,97.44 -36.47,97.44 -36.47,97.44 -36.47,97.44 36.47,97.44 36.47,97.44 36.47,97.44 36.47,97.44 38.39,95.52 38.39,95.52 38.39,95.52 38.39,95.52 38.39,-95.52 38.39,-95.52 38.39,-95.52 38.39,-95.52 36.47,-97.44 36.47,-97.44 36.47,-97.44 36.47,-97.44 -36.47,-97.44 -36.47,-97.44 -36.47,-97.44 -36.47,-97.44
  Top Layer region: -78.74,59.05 -78.74,62.99 -78.74,62.99 -76.77,64.96 -76.77,64.96 -49.21,64.96 -49.21,64.96 -47.24,62.99 -47.24,62.99 -47.24,59.05 -47.24,59.05 -49.21,57.09 -49.21,57.09 -76.77,57.09 -76.77,57.09
  Top Layer region: -62.99,59.05 -62.99,62.99 -62.99,62.99 -61.02,64.96 -61.02,64.96 -33.46,64.96 -33.46,64.96 -31.5,62.99 -31.5,62.99 -31.5,59.05 -31.5,59.05 -33.46,57.09 -33.46,57.09 -61.02,57.09 -61.02,57.09
  Top Layer region: -47.24,59.05 -47.24,62.99 -47.24,62.99 -45.28,64.96 -45.28,64.96 -17.72,64.96 -17.72,64.96 -15.75,62.99 -15.75,62.99 -15.75,59.05 -15.75,59.05 -17.72,57.09 -17.72,57.09 -45.28,57.09 -45.28,57.09
  Top Layer region: -31.5,59.05 -31.5,62.99 -31.5,62.99 -29.53,64.96 -29.53,64.96 -1.97,64.96 -1.97,64.96 0,62.99 0,62.99 0,59.05 0,59.05 -1.97,57.09 -1.97,57.09 -29.53,57.09 -29.53,57.09 -31.5,59.05
  Top Layer region: -15.75,59.05 -15.75,62.99 -15.75,62.99 -13.78,64.96 -13.78,64.96 13.78,64.96 13.78,64.96 15.75,62.99 15.75,62.99 15.75,59.05 15.75,59.05 13.78,57.09 13.78,57.09 -13.78,57.09 -13.78,57.09
  Top Layer region: 0,59.05 0,62.99 0,62.99 1.97,64.96 1.97,64.96 29.53,64.96 29.53,64.96 31.5,62.99 31.5,62.99 31.5,59.05 31.5,59.05 29.53,57.09 29.53,57.09 1.97,57.09 1.97,57.09
  Top Layer region: 15.75,59.05 15.75,62.99 15.75,62.99 17.72,64.96 17.72,64.96 45.28,64.96 45.28,64.96 47.24,62.99 47.24,62.99 47.24,59.05 47.24,59.05 45.28,57.09 45.28,57.09 17.72,57.09 17.72,57.09
  Top Layer region: 31.5,59.05 31.5,62.99 31.5,62.99 33.46,64.96 33.46,64.96 61.02,64.96 61.02,64.96 62.99,62.99 62.99,62.99 62.99,59.05 62.99,59.05 61.02,57.09 61.02,57.09 33.46,57.09 33.46,57.09
  Top Layer region: 47.24,59.05 47.24,62.99 47.24,62.99 49.21,64.96 49.21,64.96 76.77,64.96 76.77,64.96 78.74,62.99 78.74,62.99 78.74,59.05 78.74,59.05 76.77,57.09 76.77,57.09 49.21,57.09 49.21,57.09
  Top Layer region: -94.49,59.05 -94.49,62.99 -94.49,62.99 -92.52,64.96 -92.52,64.96 -64.96,64.96 -64.96,64.96 -62.99,62.99 -62.99,62.99 -62.99,59.05 -62.99,59.05 -64.96,57.09 -64.96,57.09 -92.52,57.09 -92.52,57.09
  silkscreen extent -156,-67 126,67
USB-C-SMD_TYPE-C-USB-17 [mm]
  oval 1.2x1.8 hole 0.7 slot 1.4 at 90 deg paste+0 mask+0.051: 0(-4.32,-2.634) 0(4.32,-2.634)
  oval 1.1x2 hole 0.7 slot 1.6 at 90 deg paste+0 mask+0.051: 0(-4.32,1.566) 0(4.32,1.566)
  rect 0.5x1.3 smd paste+0 mask+0.051: A1(-3.2,2.633) A4(-2.4,2.633) A9(2.4,2.633) A12(3.2,2.633)
  rect 0.28x1.3 smd paste+0 mask+0.051: A5(-1.25,2.633) A6(-0.25,2.633) A7(0.25,2.633) A8(1.25,2.634) B5(1.75,2.633) B6(0.75,2.633) B7(-0.75,2.633) B8(-1.75,2.634)
  round 0.75 hole 0.75 slot 0.755 at 0 deg unplated paste+0 mask+0.051: ""(-2.89,0.956) ""(2.89,0.956)
  silkscreen extent -4.32,-5.22 4.32,1.75
XTAL-3213#1 [mil]
  Top Layer region: 53.15,-37.4 41.34,-37.4 41.34,-37.4 39.37,-35.43 39.37,-35.43 39.37,35.43 39.37,35.43 41.34,37.4 41.34,37.4 53.15,37.4 53.15,37.4 55.12,35.43 55.12,35.43 55.12,-35.43 55.12,-35.43
  Top Layer region: 5.91,-37.4 -5.91,-37.4 -5.91,-37.4 -7.87,-35.43 -7.87,-35.43 -7.87,35.43 -7.87,35.43 -5.91,37.4 -5.91,37.4 5.91,37.4 5.91,37.4 7.87,35.43 7.87,35.43 7.87,-35.43 7.87,-35.43
  Top Layer region: -41.34,-37.4 -53.15,-37.4 -53.15,-37.4 -55.12,-35.43 -55.12,-35.43 -55.12,35.43 -55.12,35.43 -53.15,37.4 -53.15,37.4 -41.34,37.4 -41.34,37.4 -39.37,35.43 -39.37,35.43 -39.37,-35.43 -39.37,-35.43
  silkscreen extent -35,-39 35,39
XTAL-3213#2 [mil]
  Top Layer region: 84.64,5.91 84.64,-5.9 84.64,-5.9 82.68,-7.87 82.68,-7.87 11.81,-7.87 11.81,-7.87 9.84,-5.9 9.84,-5.9 9.84,5.91 9.84,5.91 11.81,7.88 11.81,7.88 82.68,7.88 82.68,7.88
  Top Layer region: 37.4,5.9 37.4,-5.91 37.4,-5.91 35.43,-7.87 35.43,-7.87 -35.43,-7.87 -35.43,-7.87 -37.4,-5.91 -37.4,-5.91 -37.4,5.9 -37.4,5.9 -35.43,7.87 -35.43,7.87 35.43,7.87 35.43,7.87
  Top Layer region: -9.84,5.9 -9.84,-5.91 -9.84,-5.91 -11.81,-7.88 -11.81,-7.88 -82.68,-7.88 -82.68,-7.88 -84.65,-5.91 -84.65,-5.91 -84.65,5.9 -84.65,5.9 -82.68,7.87 -82.68,7.87 -11.81,7.87 -11.81,7.87
  silkscreen extent -35,-39 35,39

## Via types
v1: diameter 18, hole 8, Top Layer to Bottom Layer, tented both sides, 186 vias
v2: diameter 28, hole 16, Top Layer to Bottom Layer, tented both sides, 33 vias
v3: diameter 22, hole 12, Top Layer to Bottom Layer, tented both sides, 29 vias
v4: diameter 19.68, hole 7.87, Top Layer to Bottom Layer, tented both sides, 26 vias
v5: diameter 24, hole 12, Top Layer to Bottom Layer, tented both sides, 12 vias
v6: diameter 20, hole 12, Top Layer to Bottom Layer, tented both sides, 1 vias

## Nets (pads, with @x,y where several pads share a name; then routed paths per layer and width w, separated by ;. In a path a pad name is that pad's centre, name@x,y a point inside that pad or via, vN(x,y) a via of type N, cw(c..) or ccw(c..) an arc to the next point about the centre after c; other vN are vias at no path point)
GND: BT1.2 C4.1 C5.1 C6.1 C7.1 C8.2 C11.1 C12.1 C13.1 C14.1 C16.1 C17.1 C18.1 C19.1 C20.2 C23.1 C24.1 C25.1 C26.1 C27.1 C28.1 C29.2 C30.1 C31.1 C32.1 C33.1 C34.1 C35.1 C36.1 C37.1 C38.1 C39.1 C40.1 C41.1 C42.1 C43.1 C44.1 C45.2 C48.1 C49.1 C50.1 C51.1 C52.1 C53.1 C54.1 C55.1 C56.1 C57.1 C58.1 C59.1 C60.1 C61.1 C62.1 C63.1 C64.1 C65.1 C66.1 C67.1 C68.1 C69.1 D4.2 J1.2 J1.5 J1.8 J1.11 J1.17 J1.20 J1.21 J1.22 J1.23 J2.1 J2.8 J2.9 J2.11 J2.13 J2.15 J2.17 J2.19 J2.21 J2.23 J2.25 J2.27 J2.29 J2.30 J2.32 J2.35 J2.40 J2.41 P1.4 Q1.2 R2.2 R7.2 R10.1 R11.2 R13.2 R19.2 R21.2 R23.2 R26.2 R27.1 R34.2 R36.2 R37.1 R48.1 R51.2 R52.2 R53.2 R54.2 R55.2 R56.2 R57.2 R61.2 R62.2 R66.2 R67.2 S1.1 S2.a S2.b U1.A1 U1.A12 U1.C4 U1.C6 U1.D3 U1.D6 U1.D7 U1.E5 U1.E6 U1.E7 U1.F4 U1.F5 U1.F6 U1.F7 U1.G3 U1.G4 U1.G5 U1.G6 U1.G7 U1.G8 U1.H6 U1.H10 U1.K5 U1.K6 U1.K7 U1.K10 U1.L10 U1.M1 U1.M11 U1.M12 U2.1 U2.4 U2.5 U2.12 U2.13 U2.15 U2.17 U2.21 U4.49 U5.3 U5.8 U6.3 U6.8 U7.3 U7.8 U8.3 U8.9 USB1.0 USB1.A1 USB1.A5 USB1.A12 USB1.B5 | length 4601.5
  Top Layer w6: v1(2685.98,2321.38) C28.1@2685.98,2345.04 ; v1(2725.98,2321.38) C27.1@2725.98,2345.04 ; v1(2765.98,2321.38) C26.1@2765.98,2345.04 ; v1(3597,2309.38) v1@3599.72,2309.38 ; v1(3603,2375.38) 3603,2372.15 3611.64,2363.51 U2.1@3626.88,2363.51 ; U2.5@3626.88,2300.52 3610.62,2300.52 3607.81,2303.33 3605.77,2303.33 v1@3599.72,2309.38 ; U2.4@3626.88,2316.27 3626.52,2315.91 3606.78,2315.91 3600.25,2309.38 v1@3599.72,2309.38 ; U2.12@3737,2316.38 3755.45,2316.38 v3@3763.45,2324.38 ; U2.13@3742,2331.38 3742.28,2331.66 3755.7,2331.66 3762.97,2324.38 v3@3763.45,2324.38 ; v3(3764,2324.38) v3@3763.45,2324.38 ; R2.2@3799,2455.61 R2.2@3799.13,2455.48
  Top Layer w9: U1.H10@2973.82,3174.61 v1(2986.61,3161.81) ; 2995.47,2893.11 2995.74,2893.37 2995.74,2939.11 v1(2996,2939.38)
  Top Layer w9.84: v1(2730.7,3059.45) U1.M1@2743.5,3072.25 ; v1(2730.7,3366.54) U1.A1@2743.5,3353.74 ; v1(2781.89,3187.41) U1.G3@2794.68,3200.2 ; v1(2807.48,3187.4) U1.G4@2820.27,3200.2 ; v1(2807.48,3289.77) U1.C4@2820.27,3302.56 ; U1.F4@2820.27,3225.79 v1(2833.07,3238.59) U1.F5@2845.86,3225.79 ; v1(2833.07,3110.63) U1.K5@2845.86,3123.43 ; U1.G5@2845.86,3200.2 v1(2858.66,3187.4) U1.G6@2871.45,3200.2 ; U1.E5@2845.86,3251.38 v1(2858.66,3238.59) ; v1(2858.66,3110.63) U1.K6@2871.45,3123.43 ; v1(2858.66,3161.81) U1.H6@2871.45,3174.61 ; U1.F6@2871.45,3225.79 v1(2858.66,3238.59) ; U1.E6@2871.45,3251.38 v1(2858.66,3238.59) ; U1.D6@2871.45,3276.97 v1(2858.66,3289.77) U1.C6@2871.45,3302.56 ; v1(2884.25,3110.63) U1.K7@2897.04,3123.43 ; U1.G7@2897.04,3200.2 v1(2909.84,3187.4) U1.G8@2922.63,3200.2 ; U1.F7@2897.04,3225.79 v1(2909.84,3238.59) ; U1.E7@2897.04,3251.38 v1(2909.84,3264.18) ; U1.D7@2897.04,3276.97 v1(2909.84,3289.77) ; U1.L10@2973.82,3097.84 v1(2986.61,3085.04) U1.M11@2999.41,3072.25 ; U1.K10@2973.82,3123.43 v1(2986.61,3110.63) ; U1.M12@3025,3072.25 v1(3037.79,3059.45) ; U1.A12@3025,3353.74 v1(3037.79,3366.54) ; J1.8@3993.58,3180.75 v3(4057.76,3180.75) ; J1.2@3993.58,3298.86 v3(4057.76,3298.86)
  Top Layer w10: v1(1532,3172.39) J2.35@1555.89,3172.39 ; v1(1532,3243.24) J2.29@1555.9,3243.24 ; v1(1532,3266.86) J2.27@1555.9,3266.86 ; v1(1532,3290.48) J2.25@1555.9,3290.48 ; v1(1532,3314.1) J2.23@1555.9,3314.1 ; v1(1532,3337.75) J2.21@1555.89,3337.75 ; v1(1532,3361.38) J2.19@1555.86,3361.38 ; v1(1532,3384.97) J2.17@1555.9,3384.97 ; v1(1532,3408.59) J2.15@1555.86,3408.59 ; v1(1532,3432.21) J2.13@1555.9,3432.21 ; v1(1532,3455.84) J2.11@1555.89,3455.84 ; v1(1532,3479.48) J2.9@1555.89,3479.48 ; v1(1532,3573.87) J2.1@1555.94,3573.87 ; v1(1540,1813.38) 1540.16,1813.54 1540.16,1841.22 R57.2@1540.31,1841.38 1540.47,1841.54 1540.47,1901.22 R56.2@1540.63,1901.38 1540.47,1901.54 1540.47,1961.22 R55.2@1540.31,1961.38 ; v1(1540,3598.38) 1540.43,3597.94 1567.51,3597.94 J2.40@1567.94,3597.51 ; v1(1541,3101.38) J2.41@1567.93,3101.43 ; v1(1617.63,2326.7) R19.2@1640,2326.7 ; v1(1617.63,2476.38) R21.2@1640.31,2476.38 ; v1(1617.63,2556.38) C16.1@1640.31,2556.38 ; v1(1617.63,2596.38) R27.1@1640.63,2596.38 ; J2.30@1674.09,3231.32 v1(1704,3231.32) ; J2.8@1674.12,3491.18 v1(1704,3491.18) ; J2.32@1674.18,3207.72 v1(1704,3207.72) ; C13.1@1760,2246.07 v1(1760,2268.43) ; 1838.5,2476.46 1838.5,2468.28 v4@1856.07,2450.72 ; v1(1840,2179.88) R23.2@1840,2206.7 ; v4(1860.15,2454.81) 1860.16,2441.48 1871.89,2429.74 1899,2429.74 1899.53,2429.21 ; R10.1@1915.55,3131.38 1941,3131.38 v1(1941,3132.38) ; v1(1918.76,2179.88) R13.2@1918.76,2206.7 ; v1(1958.14,2179.88) C7.1@1958.14,2206.7 ; C12.1@2039.68,2656.38 v1(2039.68,2678.74) ; C4.1@2210,2386.38 v1(2236.82,2386.38) ; C5.1@2210,2426.38 v1(2236.82,2426.38) ; C6.1@2210,2466.38 v1(2236.82,2466.38) ; C24.1@2769.37,2611.07 2788,2611.06 v1(2788,2611.38) ; C25.1@2769.68,2571.07 v1@2788.32,2571.06 ; U1.D3@2794.68,3276.97 v1(2807.48,3289.77) ; v1(2855.18,1935.16) 2855.18,1940 USB1.A5@2855.18,1973.75 ; v1(2973.29,1935.16) 2973.3,1940 USB1.B5@2973.29,1973.75 ; C23.1@3140.67,2534.73 3165,2534.72 v1(3165,2535.38) ; C20.2@3140.98,2494.73 3153.86,2494.72 3153.86,2495.38 v1(3165,2495.38) ; v1(3300,1794.38) 3300.12,1794.38 S1.1@3300.12,1758.29 ; v3(3421,2190.79) C64.1@3443.19,2190.79 ; v3(3421,2230.79) C62.1@3443.19,2230.79 ; v3(3421,2270.79) C63.1@3443.19,2270.79 ; v3(3421,2310.79) C65.1@3443.19,2310.79 ; v3(3421,2350.17) C66.1@3443.19,2350.17 ; v3(3421,2390.17) C67.1@3443.19,2390.17 ; v3(3421,2430.17) C68.1@3443.19,2430.17 ; v3(3421,2469.55) C69.1@3443.19,2469.55 ; R36.2@3441.18,2791.38 3441.4,2791.16 3441.4,2773.88 v1(3441.62,2773.67) ; v3(3651.45,2158.38) C58.1@3651.45,2183.08 ; C60.1@3654.13,2490.48 v3(3654.13,2511.38) ; C61.1@3694.13,2490.48 v3(3694.13,2511.38) ; U2.21@3698,2348.38 3698.73,2349.11 U2.17@3698.73,2388.12 ; U2.15@3739.08,2363.51 3740,2364.43 v1(3740,2378.38) ; v1(3764.84,3011.07) U7.8@3793.28,3011.07 ; v1(3764.84,3142.01) U5.8@3793.28,3142.01 ; v1(3764.84,3271.07) U6.8@3793.28,3271.07 ; v3(3769.59,2158.38) C59.1@3769.59,2182.77 ; R2.2@3799,2455.61 v3(3799,2474.38) ; U7.3@3823.4,3011.07 v1@3851.85,3011.06 ; U5.3@3823.4,3142.01 v1@3851.85,3142.01 ; U6.3@3823.4,3271.07 v1@3851.85,3271.06 ; v3(3879.13,2158.38) C54.1@3879.13,2181.11 ; C57.1@3879.13,2390.48 v3(3879.13,2412.38) ; v3(3919.13,2158.38) C55.1@3919.13,2182.77 ; C56.1@3919.13,2390.48 v3(3919.13,2412.38) ; J1.17@3993.58,3003.59 4052.92,3003.58 v1(4057.76,3003.59) ; J1.11@3993.58,3121.7 4052.92,3121.69 v3(4057.76,3121.7) ; J1.5@3993.58,3239.81 4052.92,3239.8 v3(4057.76,3239.81)
  Top Layer w16: C19.1@1650,2774.37 v1(1650,2806.38) ; C14.1@1680,2397.01 1680.13,2396.88 1698.95,2396.88 1704.46,2391.38 v1(1705,2391.38) ; P1.4@1823.58,1803.86 1824.29,1804.56 1824.29,1850.67 v5(1825,1851.38) ; C17.1@1977.63,2748.16 v1(1977.63,2768.74) ; v1(2000,2354.38) C8.2@2000,2376.7 ; R26.2@2039.68,2496.38 2039.68,2496.87 2039.81,2496.99 2067.62,2496.99 v1(2068,2497.38) ; C11.1@2077.63,2724.89 v1(2101.49,2724.89) ; C18.1@2086.5,2824.94 C18.1@2089.72,2824.95 v1(2115,2824.95) ; D4.2@2120.23,2634.41 2121.75,2632.89 2143.48,2632.89 v5(2145,2631.38) ; v5(2145,1791.38) 2145,1757.29 S2.a@2148.07,1754.22 ; v5(2215,1911.38) S2.b@2215,1955.01 ; v5(2575,1791.38) 2575,1756.42 S2.a@2577.2,1754.22 ; v2(2777,1946.38) 2777.7,1947.08 2777.7,1973.05 USB1.A1@2778.41,1973.75 ; R37.1@2884.25,3511.89 v1(2884.25,3532.88) ; v2(3030,1947.38) 3030.19,1947.57 3030.19,1973.56 USB1.A12@3030.38,1973.75 ; 3135.98,2406.97 3136.11,2406.84 3183.99,2406.84 3184.46,2406.38 v1(3185,2406.38) ; C52.1@3136.89,2274.3 v1(3161,2274.3) ; R62.2@3214.68,2141.38 v1(3235,2141.38) ; R61.2@3214.68,2191.38 v1(3235,2191.38) ; Q1.2@3451.65,2653.98 3451.95,2653.68 3511.7,2653.68 v2(3512,2653.38) ; v1(3518,2324.38) 3518,2309.61 R11.2@3518.06,2309.55 ; v1(3558,2333.38) 3558,2348.54 R7.2@3558.06,2348.6 ; R53.2@3670.68,2025.88 3670.68,2027.59 3670.81,2027.72 3690.8,2027.72 3694.46,2031.38 v1(3695,2031.38) ; R54.2@3744.37,2571.38 v1(3775,2571.38) ; v1(3772,2900.38) 3772.09,2900.29 3793.73,2900.29 C29.2@3793.82,2900.2 ; v2(3893,1773.38) 3893.47,1772.9 3926.97,1772.9 3927.09,1772.78 R66.2@3927.09,1772.43 ; v1(3927,1954.38) 3927.05,1954.33 3927.05,1926.42 R67.2@3927.09,1926.38 ; v6(3945,1876.38) U8.3@4017.71,1876.38 ; v1(4205,2311.38) 4205,2310.84 4205.39,2310.45 4205.39,2286 R52.2@4205.51,2285.88 ; v2(4235,1695.38) C53.1@4235,1736.38
  Bottom Layer w16: R34.2@2712.5,3375.89 2714.22,3375.88 2723.57,3366.54 v1(2730.7,3366.54) ; C51.1@2730.99,3193.62 2732.71,3193.61 2757,3217.9 2762.44,3217.9 C39.1@2762.57,3218.02 ; C50.1@2745.5,3296.43 2747.22,3296.43 2753.88,3289.76 2781.89,3289.76 ; C49.1@2755.82,3340.74 C40.1@2755.82,3380.12 v1(2755.82,3399.52) ; C45.2@2761.55,3094 2790.6,3094 2791.41,3094.8 C37.1@2793.12,3094.8 C38.1@2833.12,3094.8 2833.07,3094.86 v1(2833.07,3110.63) ; C39.1@2762.56,3219.74 C39.1@2762.57,3218.02 ; C31.1@2777.07,3265.74 2777.2,3265.87 2777.2,3285.07 2781.89,3289.76 ; v1(2781.89,3187.41) 2781.89,3198.7 C39.1@2762.57,3218.02 ; v1(2807.48,3289.77) 2781.89,3289.76 ; v1(2858.66,3187.4) 2867.31,3187.4 2880.79,3200.88 C33.1@2882.5,3200.89 ; v1(2858.66,3289.77) 2864.06,3295.17 2864.06,3316.61 C36.1@2864.19,3316.74 ; C35.1@2863.87,3356.12 2863.87,3382.57 v1(2864.5,3383.2) ; R48.1@2875.82,3129.95 2875.82,3128.23 2884.25,3119.79 v1(2884.25,3110.63) ; C48.1@2891.19,3266.74 2891.19,3265.02 2891.32,3264.9 2893.03,3264.9 2893.76,3264.17 v1(2909.84,3264.18) ; C42.1@2897.13,3313.74 2897.13,3312.02 2909.84,3299.31 v1(2909.84,3289.77) ; v1(2909.84,3187.4) 2917.58,3187.4 2931.79,3201.61 C34.1@2933.5,3201.62 ; v1(2909.84,3238.59) 2923.57,3238.58 2936.79,3225.37 C41.1@2938.5,3225.37 ; v1(2986.61,3110.63) 2994.06,3103.18 3013.38,3103.18 C30.1@3013.5,3103.06 ; R51.2@3026.19,3182.36 3026.19,3184.08 3037.72,3195.61 3050.92,3195.61 v1(3051.3,3196) ; v1(3037.79,3059.45) 3042.87,3059.45 3053.19,3069.77 C32.1@3053.19,3071.49 ; C43.1@3050.87,3228.74 3050.94,3228.67 3072.44,3228.67 v1(3072.5,3228.61) ; C44.1@3051.19,3268.12 3051.26,3268.05 3072.75,3268.05 v1(3072.82,3267.99)
  other v1: 3667.98,2317.02 3697.98,2317.02 3667.98,2347.02 3697.98,2347.02 2788.31,2571.38 3851.85,3011.07 3851.85,3142.01 2562,3183.38 2195,3192.38 2395.86,3268.38 3851.85,3271.07 2195,3272.38 2553.86,3315.38 2629.86,3315.38 2395.86,3343.38
  other v4: 4081.69,1858.07 4125,1858.07 4168.3,1858.07 4081.69,1901.38 4125,1901.38 4168.3,1901.38 4081.69,1944.69 4125,1944.69 4168.3,1944.69 2886.69,2337.76 2930,2337.76 2973.3,2337.76 2886.69,2381.07 2930,2381.07 2973.3,2381.07 1816.85,2411.5 1860.15,2411.5 2886.69,2424.37 2930,2424.37 2973.3,2424.37 1816.85,2454.81 1816.85,2498.11 1860.15,2498.11 1816.85,2541.42 1860.15,2541.42
HDMI_DET: Q1.3 TP21.1 U4.38 | length 761.5
  Top Layer w6: U4.38@2978.23,2482.44 2978.23,2547.61 2978.23,2655.52 3014.09,2691.38 TP21.1@3246,2691.38 ; TP21.1@3244.33,2691.38 Q1.3@3550.08,2691.38
HDMIRX_+5V: C29.1 D6.1 J1.18 R35.1 TP20.1 | length 792.2
  Top Layer w10: R35.1@3550.86,2791.38 3578.32,2791.38 3619.5,2750.2 TP20.1@3693.5,2750.2 3727.5,2784.2 3809.5,2784.2 3821.38,2796.07 3821.38,2864.76 3833.19,2876.57 3833.19,2902.16 3836.06,2905.04 3838.03,2905.04 3858.19,2925.2 4063.5,2925.2 4073.5,2935.2 4073.5,2970.2 4059.8,2983.9 J1.18@3993.58,2983.9
HDMIRX_CEC: J1.13 R33.2 R49.2 TP18.1 U7.5 U7.6 | length 635.3
  Top Layer w10: R49.2@3480.06,2956.38 R33.2@3508.82,2956.38 3508.82,3045.51 3534.68,3071.38 TP18.1@3615.86,3071.38 3689.92,3071.38 3710.87,3050.43 U7.6@3790.82,3050.44 U7.5@3825.86,3050.44 3873.74,3050.43 3905.63,3082.32 J1.13@3993.58,3082.33
HDMIRX_CLK_N: J1.12 R39.2 U5.1 U5.10 | length 468.8
  Top Layer w5.97: R39.2@3555.55,3111.38 3560.44,3116.27 3560.44,3122.4 3563.94,3125.89 3661.88,3125.89 3680.78,3106.99 3777.12,3106.99 3781.48,3102.64 U5.10@3790.82,3102.64 U5.1@3825.86,3102.64 3835.22,3102.64 3839.57,3106.99 3881.77,3106.99 3890.98,3116.21 3933.2,3116.21 3939.71,3109.7 3940.22,3109.7 3947.91,3102.01 J1.12@3993.58,3102.01
HDMIRX_CLK_P: J1.10 R38.2 U5.2 U5.9 | length 468.5
  Top Layer w5.97: R38.2@3555.86,3151.38 3560.76,3146.49 3560.76,3140.36 3564.25,3136.86 3666.42,3136.86 3685.32,3117.97 3777.12,3117.97 3781.48,3122.32 U5.9@3790.82,3122.33 U5.2@3825.86,3122.33 3835.22,3122.32 3839.57,3117.97 3877.22,3117.97 3886.44,3127.18 3933.2,3127.18 3939.71,3133.69 3940.22,3133.69 3947.91,3141.38 J1.10@3993.58,3141.38
HDMIRX_D0_N: J1.9 R41.2 U5.4 U5.7 | length 359.2
  Top Layer w5.97: R41.2@3665.55,3171.38 3670.44,3176.27 3670.44,3182.4 3673.94,3185.89 3716.25,3185.89 3736.09,3166.05 3777.12,3166.05 3781.48,3161.69 U5.7@3790.82,3161.7 U5.4@3825.86,3161.7 3835.22,3161.69 3839.57,3166.05 3881.77,3166.05 3890.98,3175.26 3933.2,3175.26 3939.71,3168.75 3940.22,3168.75 3947.91,3161.06 J1.9@3993.58,3161.07
HDMIRX_D0_P: J1.7 R40.2 U5.5 U5.6 | length 359.5
  Top Layer w5.97: R40.2@3665.23,3211.38 3670.12,3206.49 3670.12,3200.36 3673.62,3196.86 3720.79,3196.86 3740.63,3177.02 3777.12,3177.02 3781.48,3181.38 U5.6@3790.82,3181.38 U5.5@3825.86,3181.38 3835.22,3181.38 3839.57,3177.02 3877.22,3177.02 3886.44,3186.23 3933.2,3186.23 3939.71,3192.74 3940.22,3192.74 3947.91,3200.43 J1.7@3993.58,3200.44
HDMIRX_D1_N: J1.6 R43.2 U6.1 U6.10 | length 461.9
  Top Layer w5.97: R43.2@3555.55,3231.38 3560.44,3236.27 3560.44,3242.4 3563.94,3245.89 3669.21,3245.89 3679.05,3236.05 3777.12,3236.05 3781.48,3231.69 U6.10@3790.82,3231.7 U6.1@3825.86,3231.7 3835.22,3231.69 3839.57,3236.05 3880.97,3236.05 3882.7,3234.32 3933.2,3234.32 3939.71,3227.81 3940.22,3227.81 3947.91,3220.12 J1.6@3993.58,3220.12
HDMIRX_D1_P: J1.4 R42.2 U6.2 U6.9 | length 461.9
  Top Layer w5.97: R42.2@3555.55,3271.38 3560.44,3266.49 3560.44,3260.36 3563.94,3256.86 3673.75,3256.86 3683.59,3247.02 3777.12,3247.02 3781.48,3251.38 U6.9@3790.82,3251.38 U6.2@3825.86,3251.38 3835.22,3251.38 3839.57,3247.02 3885.51,3247.02 3887.24,3245.29 3933.2,3245.29 3939.71,3251.8 3940.22,3251.8 3947.91,3259.49 J1.4@3993.58,3259.49
HDMIRX_D2_N: J1.3 R45.2 U6.4 U6.7 | length 352
  Top Layer w5.97: R45.2@3665.86,3291.38 3670.76,3296.27 3670.76,3302.4 3674.25,3305.89 3723.82,3305.89 3734.6,3295.11 3777.12,3295.11 3781.48,3290.75 U6.7@3790.82,3290.75 U6.4@3825.86,3290.75 3835.22,3290.75 3839.57,3295.11 3880.97,3295.11 3882.7,3293.37 3933.2,3293.37 3939.71,3286.86 3940.22,3286.86 3947.91,3279.17 J1.3@3993.58,3279.18
HDMIRX_D2_P: J1.1 R44.2 U6.5 U6.6 | length 352.3
  Top Layer w5.97: R44.2@3665.55,3331.38 3670.44,3326.49 3670.44,3320.36 3673.94,3316.86 3728.36,3316.86 3739.15,3306.07 3777.12,3306.07 3781.48,3310.43 U6.6@3790.82,3310.44 U6.5@3825.86,3310.44 3835.22,3310.43 3839.57,3306.07 3885.51,3306.07 3887.24,3304.34 3933.2,3304.34 3939.71,3310.86 3940.22,3310.86 3947.91,3318.54 J1.1@3993.58,3318.55
HDMIRX_HPD: J1.19 R50.2 TP19.1 U7.1 U7.10 | length 619.4
  Top Layer w10: R50.2@3480.06,2836.38 3512.16,2836.38 3523.34,2825.2 TP19.1@3634.5,2825.2 3679.68,2870.38 3730,2870.38 3747,2887.38 3747,2951.38 3767.32,2971.69 U7.10@3790.82,2971.7 U7.1@3825.86,2971.7 3887.29,2971.69 3894.77,2964.21 J1.19@3993.58,2964.22
HDMIRX_SCL: J1.15 R32.2 R47.2 TP17.1 U7.4 U7.7 | length 567.4
  Top Layer w10: R47.2@3479.74,2916.38 R32.2@3508.82,2916.38 3508.82,2918.35 3525.84,2935.36 3598.67,2935.36 TP17.1@3633.5,2970.2 3694.05,3030.75 U7.7@3790.82,3030.75 U7.4@3825.86,3030.75 3884.14,3030.75 3896.35,3042.95 J1.15@3993.58,3042.96
HDMIRX_SDA: J1.16 R31.2 R46.2 TP16.1 U7.2 U7.9 | length 634.7
  Top Layer w10: R46.2@3480.06,2876.38 R31.2@3508.82,2876.38 3508.82,2874.41 3533.03,2850.2 3573.5,2850.2 3633.5,2910.2 TP16.1@3701.48,2910.2 3701.48,2974.18 3718.68,2991.38 U7.9@3790.82,2991.38 U7.2@3825.86,2991.38 3889.68,2991.38 3921.57,3023.27 J1.16@3993.58,3023.27
HR_CLK_N: R39.1 U1.L11 | length 548.6
  Top Layer w5.97: U1.L11@2999.41,3097.84 3012.2,3085.04 3077.5,3085.04 3078.42,3085.95 3211.85,3085.95 3251.79,3125.89 3507.8,3125.89 3511.29,3122.4 3511.29,3116.27 R39.1@3516.18,3111.38
HR_CLK_P: R38.1 U1.L12 | length 549.7
  Top Layer w5.97: U1.L12@3025,3097.84 3077.5,3097.84 3078.42,3096.92 3207.31,3096.92 3207.38,3097 3209.49,3099.11 3209.49,3104.05 3209.03,3104.52 3209.03,3106.85 3214.45,3112.28 3216.78,3112.28 3218.56,3110.5 3220.89,3110.5 3226.32,3115.93 3226.32,3118.26 3224.54,3120.03 3224.54,3122.36 3229.97,3127.79 3232.3,3127.79 3232.76,3127.32 3237.71,3127.32 3247.25,3136.86 3253.51,3136.86 3255,3136.86 3257.99,3136.86 3261.48,3140.36 3261.48,3142.76 3263.13,3144.4 3270.81,3144.4 3272.45,3142.76 3272.45,3138.51 3274.1,3136.86 3281.78,3136.86 3283.42,3138.51 3283.42,3141.78 3285.07,3143.43 3292.75,3143.43 3294.39,3141.78 3294.39,3140.36 3297.89,3136.86 3333.42,3136.86 3508.11,3136.86 3511.61,3140.36 3511.61,3146.49 R38.1@3516.49,3151.38
HR_D0_N: R41.1 U1.K11 | length 672.8
  Top Layer w5.97: U1.K11@2999.41,3123.43 3012.2,3110.63 3076.5,3110.63 3077.42,3111.54 3184.95,3111.54 3259.02,3185.61 3447.86,3185.61 3448.15,3185.89 3617.8,3185.89 3621.29,3182.4 3621.29,3176.27 R41.1@3626.18,3171.38
HR_D0_P: R40.1 U1.K12 | length 669.9
  Top Layer w5.97: U1.K12@3025,3123.43 3076.5,3123.43 3077.42,3122.51 3180.41,3122.51 3186.9,3129 3189.01,3131.11 3189.01,3136.06 3187.7,3137.37 3187.7,3139.7 3193.13,3145.13 3195.45,3145.13 3198.08,3142.51 3200.4,3142.51 3205.83,3147.93 3205.83,3150.26 3203.21,3152.88 3203.21,3155.21 3208.64,3160.64 3210.97,3160.64 3213.59,3158.02 3215.92,3158.02 3221.35,3163.45 3221.35,3165.78 3218.72,3168.4 3218.72,3170.72 3224.16,3176.16 3226.48,3176.16 3227.8,3174.84 3232.74,3174.84 3253.6,3195.71 3254.47,3196.58 3443.32,3196.58 3443.61,3196.86 3617.48,3196.86 3620.98,3200.36 3620.98,3206.49 R40.1@3625.86,3211.38
HR_D1_N: R43.1 U1.J11 | length 577.1
  Top Layer w5.97: U1.J11@2999.41,3149.02 3012.2,3136.22 3075.5,3136.22 3076.42,3137.13 3157.55,3137.13 3266.3,3245.89 3507.8,3245.89 3511.29,3242.4 3511.29,3236.27 R43.1@3516.18,3231.38
HR_D1_P: R42.1 U1.J12 | length 574.4
  Top Layer w5.97: U1.J12@3025,3149.02 3075.5,3149.02 3076.42,3148.1 3153,3148.1 3161.4,3156.5 3163.51,3158.61 3163.51,3163.56 3162.2,3164.86 3162.2,3167.19 3167.63,3172.62 3169.96,3172.62 3172.58,3170.01 3174.9,3170.01 3180.33,3175.43 3180.33,3177.76 3177.72,3180.38 3177.72,3182.7 3183.15,3188.14 3185.47,3188.14 3188.09,3185.52 3190.42,3185.52 3195.85,3190.95 3195.85,3193.28 3193.23,3195.89 3193.23,3198.22 3198.66,3203.65 3200.99,3203.65 3202.29,3202.34 3207.24,3202.34 3227.12,3222.23 3261.76,3256.86 3507.8,3256.86 3511.29,3260.36 3511.29,3266.49 R42.1@3516.18,3271.38
HR_D2_N: R45.1 U1.H11 | length 701.7
  Top Layer w5.97: U1.H11@2999.41,3174.61 3012.2,3161.81 3075.45,3161.81 3076.37,3162.72 3129.54,3162.72 3272.71,3305.89 3618.11,3305.89 3621.61,3302.4 3621.61,3296.27 R45.1@3626.49,3291.38